# Altium PCB PCB_2812b.PcbDoc
Units mm, origin at the board's own origin, x right, y up, seen from the top; angles counter-clockwise.
Board outline 35.05 x 27.18 mm, 2 copper layers (Top Layer, Bottom Layer); 13 components, 14 nets, 60 pads, 23 vias.
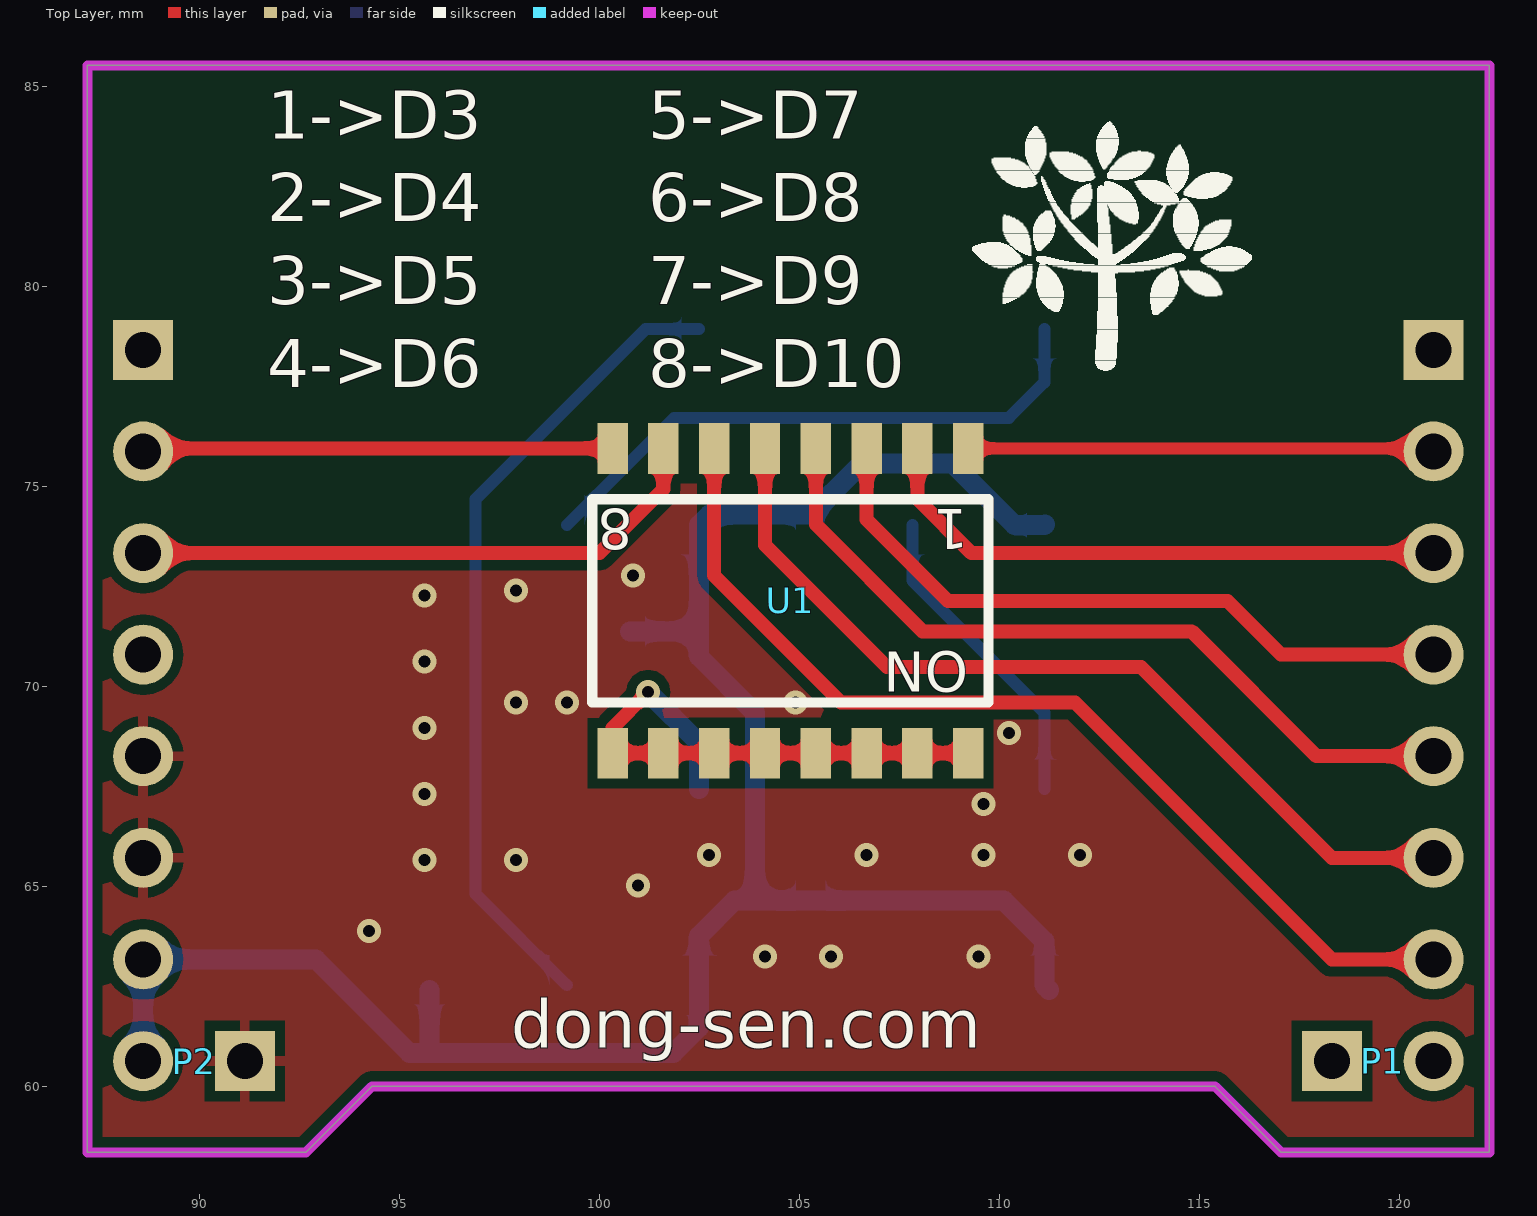
[diagram p0: Top Layer view]
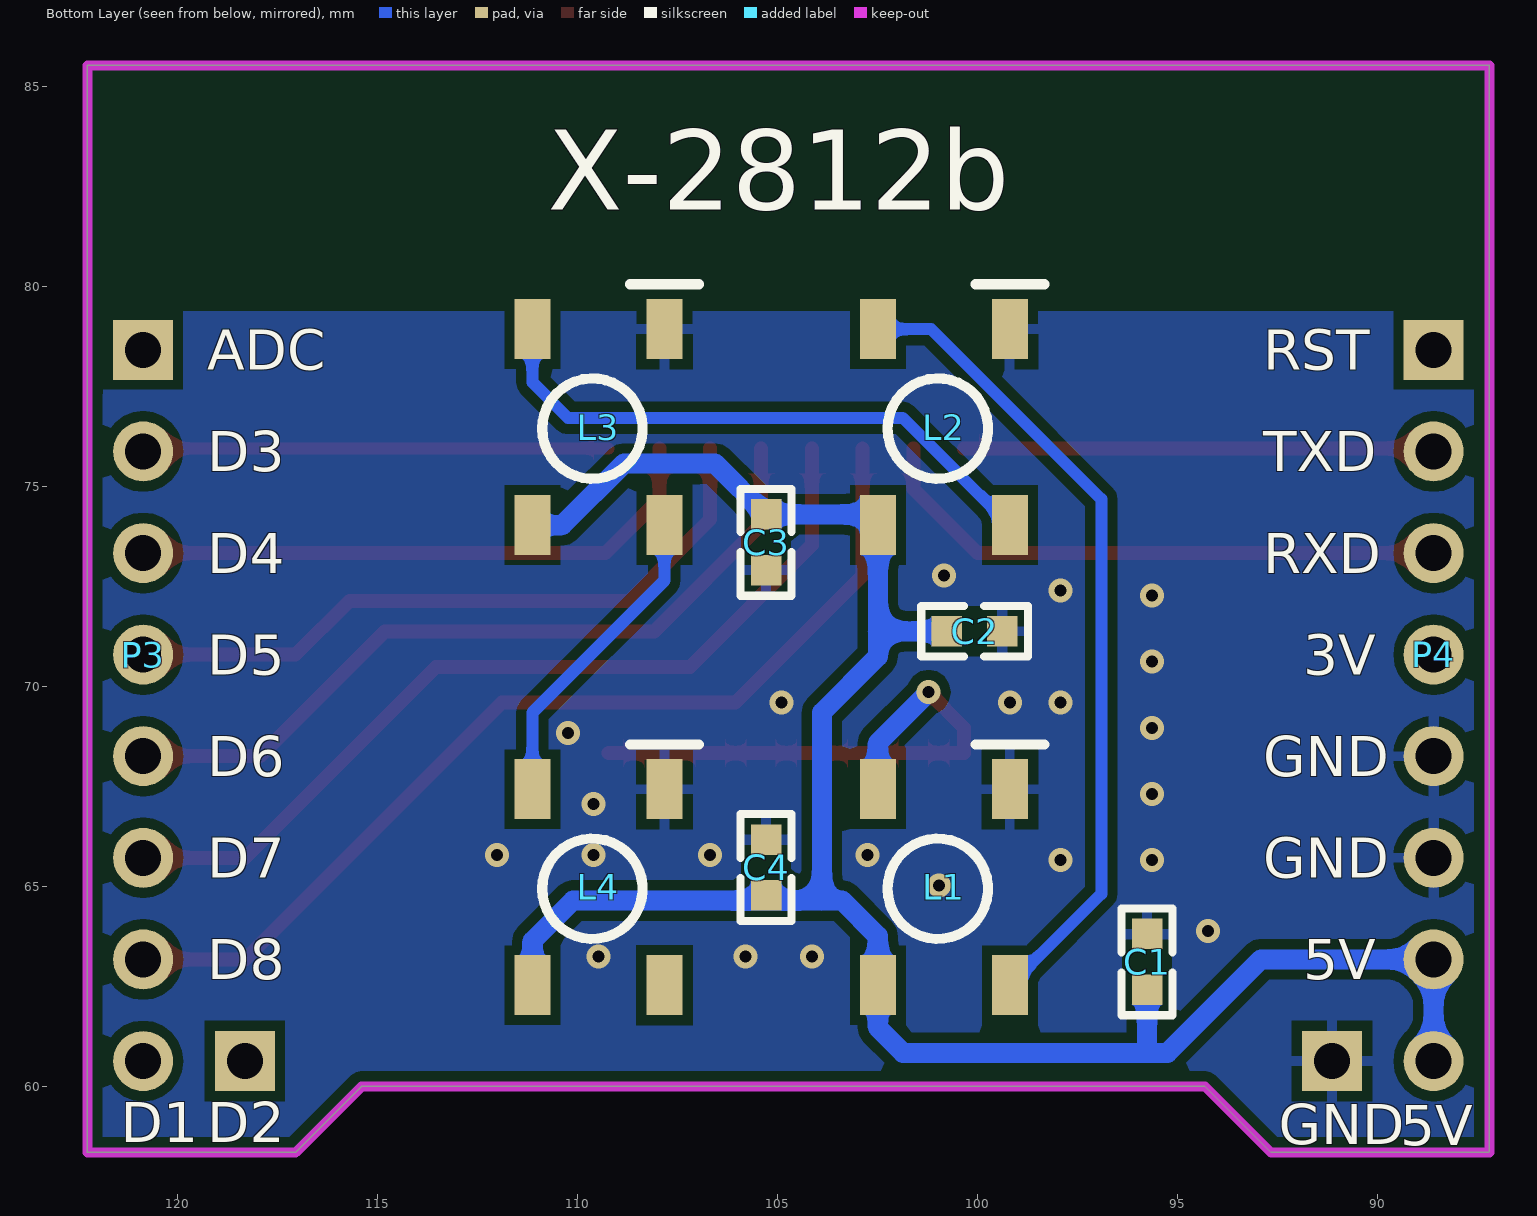
[diagram p1: Bottom Layer view, seen from below]

## Layer stack, top to bottom
Top Solder: solder mask 0.0102, Solder Resist, Dk 3.5
Top Layer: signal copper 0.0356
Dielectric 1: dielectric 0.32, FR-4, Dk 4.8
Bottom Layer: signal copper 0.0356
Bottom Solder: solder mask 0.0102, Solder Resist, Dk 3.5

## Board outline
87.198,58.344 87.198,85.522 122.25,85.522 122.25,58.344 117.043,58.344 115.392,59.995 94.31,59.995 92.659,58.344

## Design rules (kind name [scope] priority, off if disabled: settings)
Clearance [All] p1: gap=0.254
PolygonConnect PolygonConnect_via [IsVia] p1: connectstyle=Direct reliefconductorwidth=0.254 reliefentries=4 polygonreliefangle="90 Angle" airgapwidth=0.254
PolygonConnect [All] p2: connectstyle=Relief reliefconductorwidth=0.254 reliefentries=4 polygonreliefangle="90 Angle" airgapwidth=0.254
RoutingVias [All] p1: holewidth=0.711 width=1.27 viastyle="Through Hole" minholewidth=0.711 minwidth=1.27 maxholewidth=0.711 maxwidth=1.27
SolderMaskExpansion [All] p1: expansion=0.102
Width [All] p1: maxlimit=2 minlimit=0.254 preferedwidth=0.254
30 further rules are at their usual default settings.

## Classes and differential pairs
component class Sheet_2812b: C1 C2 C3 C4 L1 L2 L4 P1 P2 P3 P4 U1

## Components (designator, comment, footprint, x,y, rotation, side; value= is the part's Value field where it differs from the comment)
C1 "100nF" C0603 95.58,62.384 r90 bottom
C2 "100nF" C0603 100.794,71.196 r180 bottom
C3 "100nF" C0603 105.461,74.32 r270 bottom
C4 "100nF" C0603 105.105,64.745 r90 bottom
L1 "ws2812b" WS2812B 102.487,62.524 r90 bottom
L2 "ws2812b" WS2812B 102.487,74.028 r90 bottom
L3 "ws2812b" WS2812B 111.123,74.028 r90 bottom
L4 "ws2812b" WS2812B 111.123,62.524 r90 bottom
P1 "Header 2" HDR1X2 118.313,60.63 r0 top
P2 "Header 2" HDR1X2 91.135,60.63 r180 top
P3 "Header 7" HDR1X7 120.853,78.41 r270 bottom
P4 "Header 7" HDR1X7 88.595,78.41 r270 bottom
U1 "1.27mmSwitch" NUMBERSWITCH 109.22,75.946 r180 top

## Footprints (in the part's own frame and the unit in brackets; to place one, negate y for a bottom-side part, rotate by r counter-clockwise, add the part's x,y. Pads: shape width x height; smd on the part's side, far side on the other; paste and mask are expansions set on the pad)
C0603 [mil]
  rect 30x30 smd: 1(1,7) 2(56,7)
  silkscreen extent -24,-18 81,32
HDR1X2 [mm] "Connector; Header; 2 Position"
  rect 1.5x1.5 hole 0.9: 1(0,0)
  round 1.5 hole 0.9: 2(2.54,0)
HDR1X7 [mm] "Connector; Header; 7 Position"
  rect 1.5x1.5 hole 0.9: 1(0,0)
  round 1.5 hole 0.9: 2(2.54,0) 3(5.08,0) 4(7.62,0) 5(10.16,0) 6(12.7,0) 7(15.24,0)
NUMBERSWITCH [mm]
  rect 0.76x1.27 smd: 1(0,0) 2(1.27,0) 3(2.54,0) 4(3.81,0) 5(5.08,0) 6(6.35,0) 7(7.62,0) 8(8.89,0) 9(8.89,7.62) 10(7.62,7.62) 11(6.35,7.62) 12(5.08,7.62) 13(3.81,7.62) 14(2.54,7.62) 15(1.27,7.62) 16(0,7.62)
  silkscreen extent -0.51,1.27 9.4,6.35
WS2812B [mm]
  rect 1.5x0.9 smd: 1(0,0) 2(0,-3.3) 3(4.9,-3.3) 4(4.9,0)
  silkscreen extent 1.16,-4.17 6.02,-0.24

## Part data
C1 C2 C3 C4: library part C0603, "贴片电容"
L1 L2 L3 L4: "RGB灯珠"
P1 P2: "Header, 2-Pin"
P3 P4: "Header, 7-Pin"
U1: library part NumberSwitch, "拨码开关"

## Free pads (board coordinates)
  round 3 on Keep-Out: ""(89.738,82.982) ""(119.71,82.982)

## Via types
v1: diameter 0.6, hole 0.3, Top Layer to Bottom Layer, tented both sides, 23 vias

## Nets (pads, with @x,y where several pads share a name; then routed paths per layer and width w, separated by ;. In a path a pad name is that pad's centre, name@x,y a point inside that pad or via, vN(x,y) a via of type N, cw(c..) or ccw(c..) an arc to the next point about the centre after c; other vN are vias at no path point)
DIN: L1.4 U1.9 U1.10 U1.11 U1.12 U1.13 U1.14 U1.15 U1.16 | length 13.7
  Top Layer w0.35: v1(101.219,69.85) 100.33,68.961 U1.9 U1.10 U1.11 U1.12 U1.13 U1.14 U1.15 U1.16
  Bottom Layer w0.5: v1(101.219,69.85) 102.487,68.582 L1.4
GND: C1.2 C2.2 C3.2 C4.2 L1.3 L2.3 L3.3 L4.3 P2.1 P4.5 P4.6
  other v1: 104.14,63.246 105.791,63.246 109.474,63.246 94.234,63.881 100.965,65.024 95.631,65.659 97.917,65.659 102.743,65.786 106.68,65.786 109.601,65.786 112.014,65.786 109.601,67.056 95.631,67.31 110.236,68.834 95.631,68.961 97.917,69.596 99.187,69.596 104.902,69.596 95.631,70.612 95.631,72.263 97.917,72.39 100.838,72.771
GPIO0: P3.2 U1.1 | length 11.7
  Top Layer w0.3: U1.1 120.777,75.946 P3.2
GPIO1: P4.2 U1.8 | length 11.8
  Top Layer w0.35: P4.2@88.671,75.946 U1.8
  Top Layer w0.5: P4.2 P4.2@88.671,75.946
GPIO2: P3.3 U1.2 | length 14.7
  Top Layer w0.35: U1.2 107.95,74.676 109.296,73.33 P3.3
GPIO3: P4.3 U1.7 | length 14.7
  Top Layer w0.35: P4.3 100,73.33 101.6,74.93 U1.7
GPIO12: P3.5 U1.4 | length 19.7
  Top Layer w0.35: U1.4 105.41,74.041 108.077,71.374 114.808,71.374 117.932,68.25 P3.5
GPIO13: P3.6 U1.5 | length 22.4
  Top Layer w0.35: U1.5 104.14,73.533 107.188,70.485 113.538,70.485 118.313,65.71 P3.6
GPIO14: P3.4 U1.3 | length 17.4
  Top Layer w0.35: U1.3 106.68,74.168 108.712,72.136 115.697,72.136 117.043,70.79 P3.4
GPIO15: P3.7 U1.6 | length 25.1
  Top Layer w0.35: U1.6 102.87,72.771 106.045,69.596 111.887,69.596 118.313,63.17 P3.7
NetL1_2: L1.2 L2.4 | length 20.4
  Bottom Layer w0.3: L1.2 96.901,64.81 96.901,74.676 101.153,78.928 L2.4
NetL2_2: L2.2 L3.4 | length 14.7
  Bottom Layer w0.3: L2.2 101.867,76.708 110.236,76.708 111.123,77.595 L3.4
NetL3_2: L3.2 L4.4 | length 8
  Bottom Layer w0.3: L3.2 107.823,72.644 111.123,69.344 L4.4
VCC_5V: C1.1 C2.1 C3.1 C4.1 L1.1 L2.1 L3.1 L4.1 P2.2 P4.7 | length 53.9
  Bottom Layer w0.5: P2.2 P4.7 92.913,63.17 95.25,60.833 95.885,60.833 ; C1.1 95.758,60.96 95.885,60.833 ; C2.1 102.487,71.374 ; L3.1@111.136,74.041 L3.1 110.376,74.028 108.839,75.565 106.553,75.565 C3.1 102.754,74.295 L2.1 102.487,71.374 ; L4.1@111.238,62.409 L4.1 111.123,63.629 110.109,64.643 103.886,64.643 ; 95.885,60.833 101.854,60.833 102.487,61.466 L1.1 102.487,63.752 103.378,64.643 103.886,64.643 ; 102.487,71.374 102.487,70.741 103.886,69.342 103.886,64.643
pads on no net: L4.2 P1.1 P1.2 P3.1 P4.1 P4.4

## Polygon pours and split planes (outlines as drawn)
GND on Top Layer "Bottom_GND" (solid, remove dead copper, pour order 14): 122.25,79.375 87.198,79.375 87.198,58.344 122.25,58.344
GND on Bottom Layer "Bottom_GND" (solid, remove dead copper, pour order 16): 122.25,79.375 87.198,79.375 87.198,58.344 122.25,58.344

## Keep-outs
Keep-Out Layer:
  the board outline again, w0.254

## Silkscreen, mask and mechanical layers (free items; w line width, h text height)
Top Overlay:
  drawing of 1036 lines, arcs and shapes, not listed
  text "1->D3" at 91.694,83.693 h1.2
  text "5->D7" at 101.219,83.693 h1.2
  text "2->D4" at 91.694,81.619 h1.2
  text "6->D8" at 101.219,81.619 h1.2
  text "3->D5" at 91.694,79.544 h1.2
  text "7->D9" at 101.219,79.544 h1.2
  text "4->D6" at 91.694,77.47 h1.2
  text "8->D10" at 101.219,77.47 h1.2
  text "dong-sen.com" at 97.79,60.96 h1.2
Bottom Overlay:
  text "X-2812b" at 110.744,81.915 h2
  text "RST" at 92.849,77.91 h1
  text "ADC" at 119.253,77.91 h1
  text "TXD" at 92.849,75.37 h1
  text "D3" at 119.253,75.37 h1
  text "RXD" at 92.849,72.83 h1
  text "D4" at 119.253,72.83 h1
  text "3V" at 91.849,70.29 h1
  text "D5" at 119.253,70.29 h1
  text "GND" at 92.849,67.75 h1
  text "D6" at 119.253,67.75 h1
  text "GND" at 92.849,65.21 h1
  text "D7" at 119.253,65.21 h1
  text "5V" at 91.849,62.67 h1
  text "D8" at 119.253,62.67 h1
  text "D2" at 119.253,58.598 h1
  text "D1" at 121.412,58.598 h1
  text "GND" at 92.468,58.555 h1
  text "5V" at 89.428,58.53 h1

## Text inside footprints (layer, text, board x,y; h text height)
U1: Top Overlay "ON" at 109.22,70.866 h1 r180; Top Overlay "1" at 109.22,74.422 h1 r180; Top Overlay "8" at 100.838,74.422 h1 r180